# EAGLE board 20190801_MemEx_v1.1 (EAGLE 9.6.0)
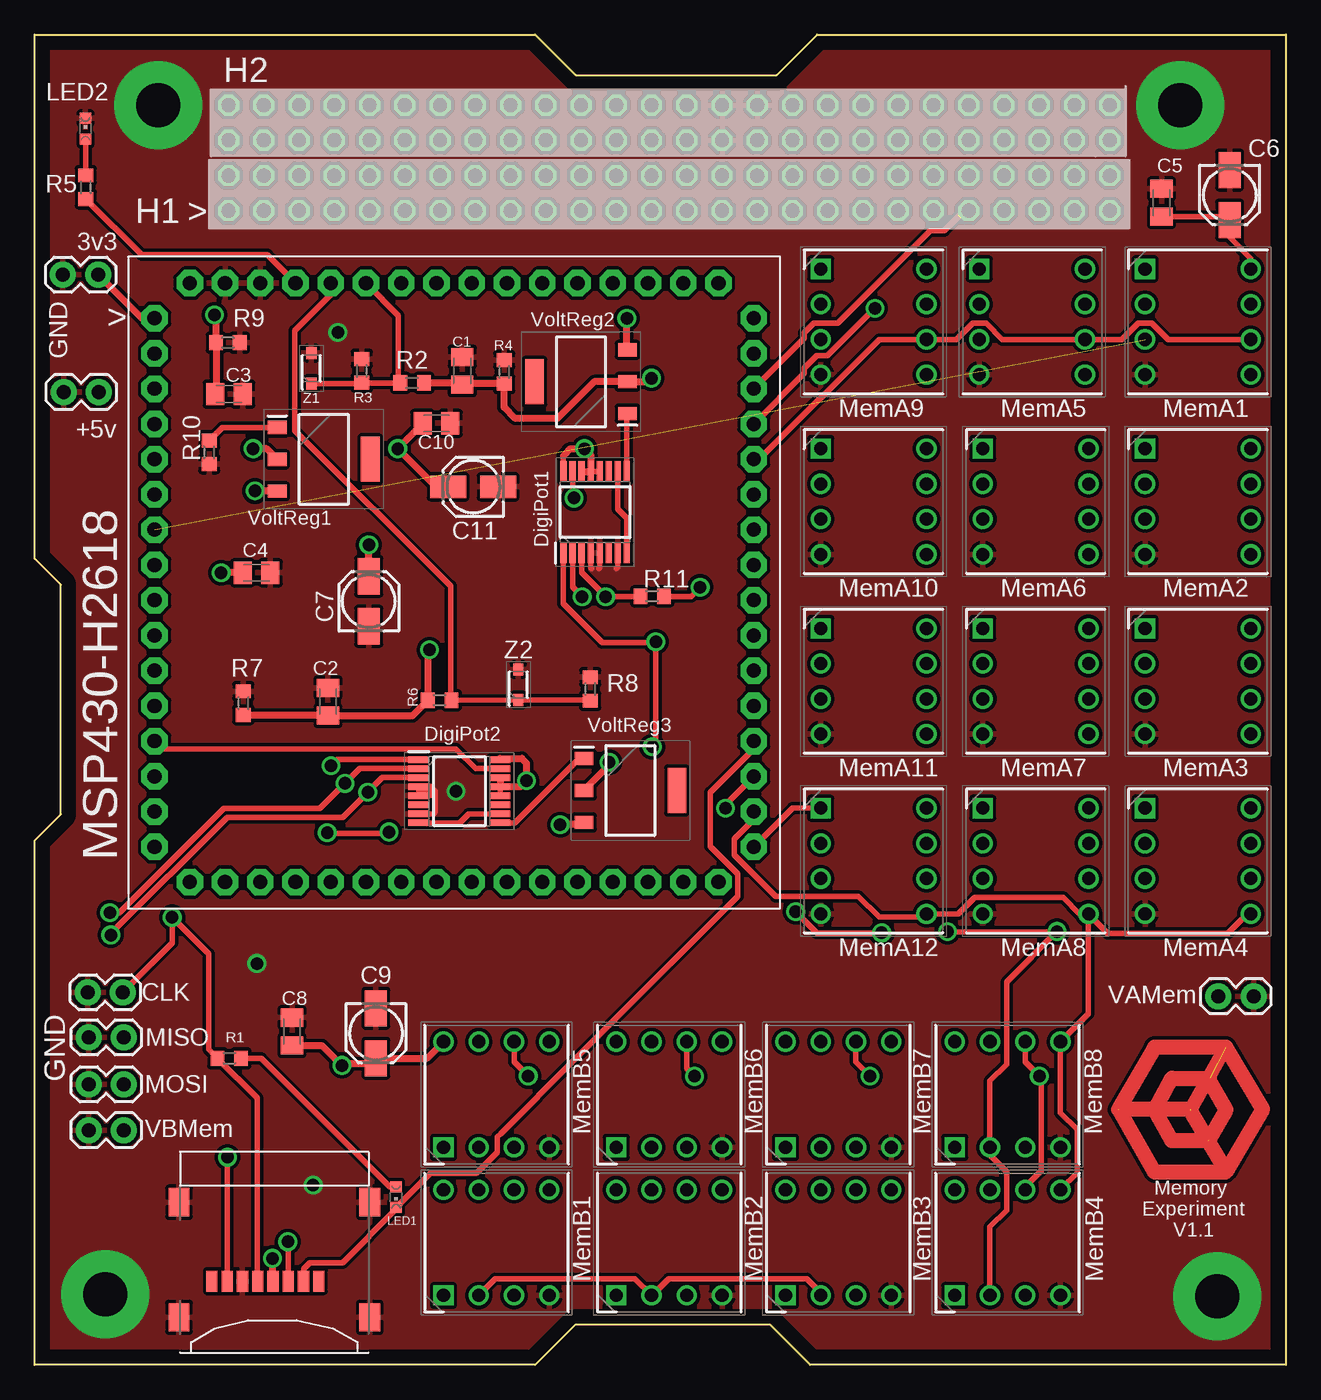
[diagram p0: board, top side]
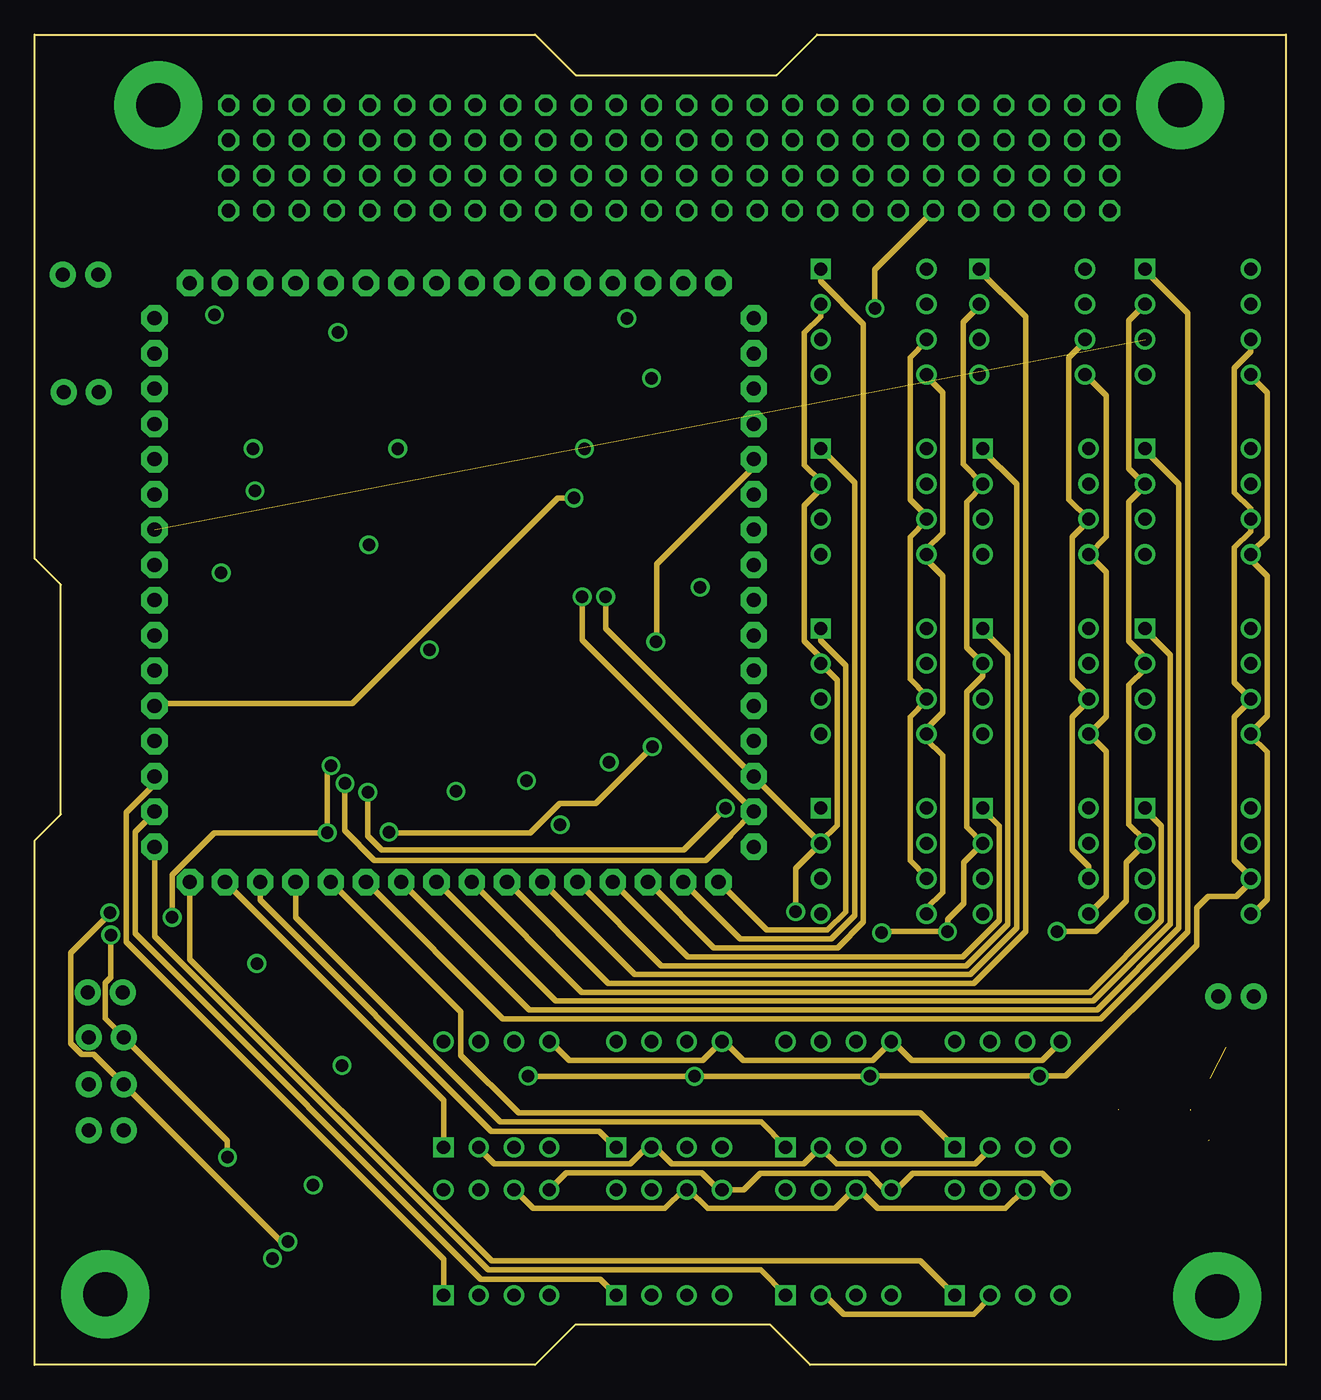
[diagram p1: board, inner layer Signal]
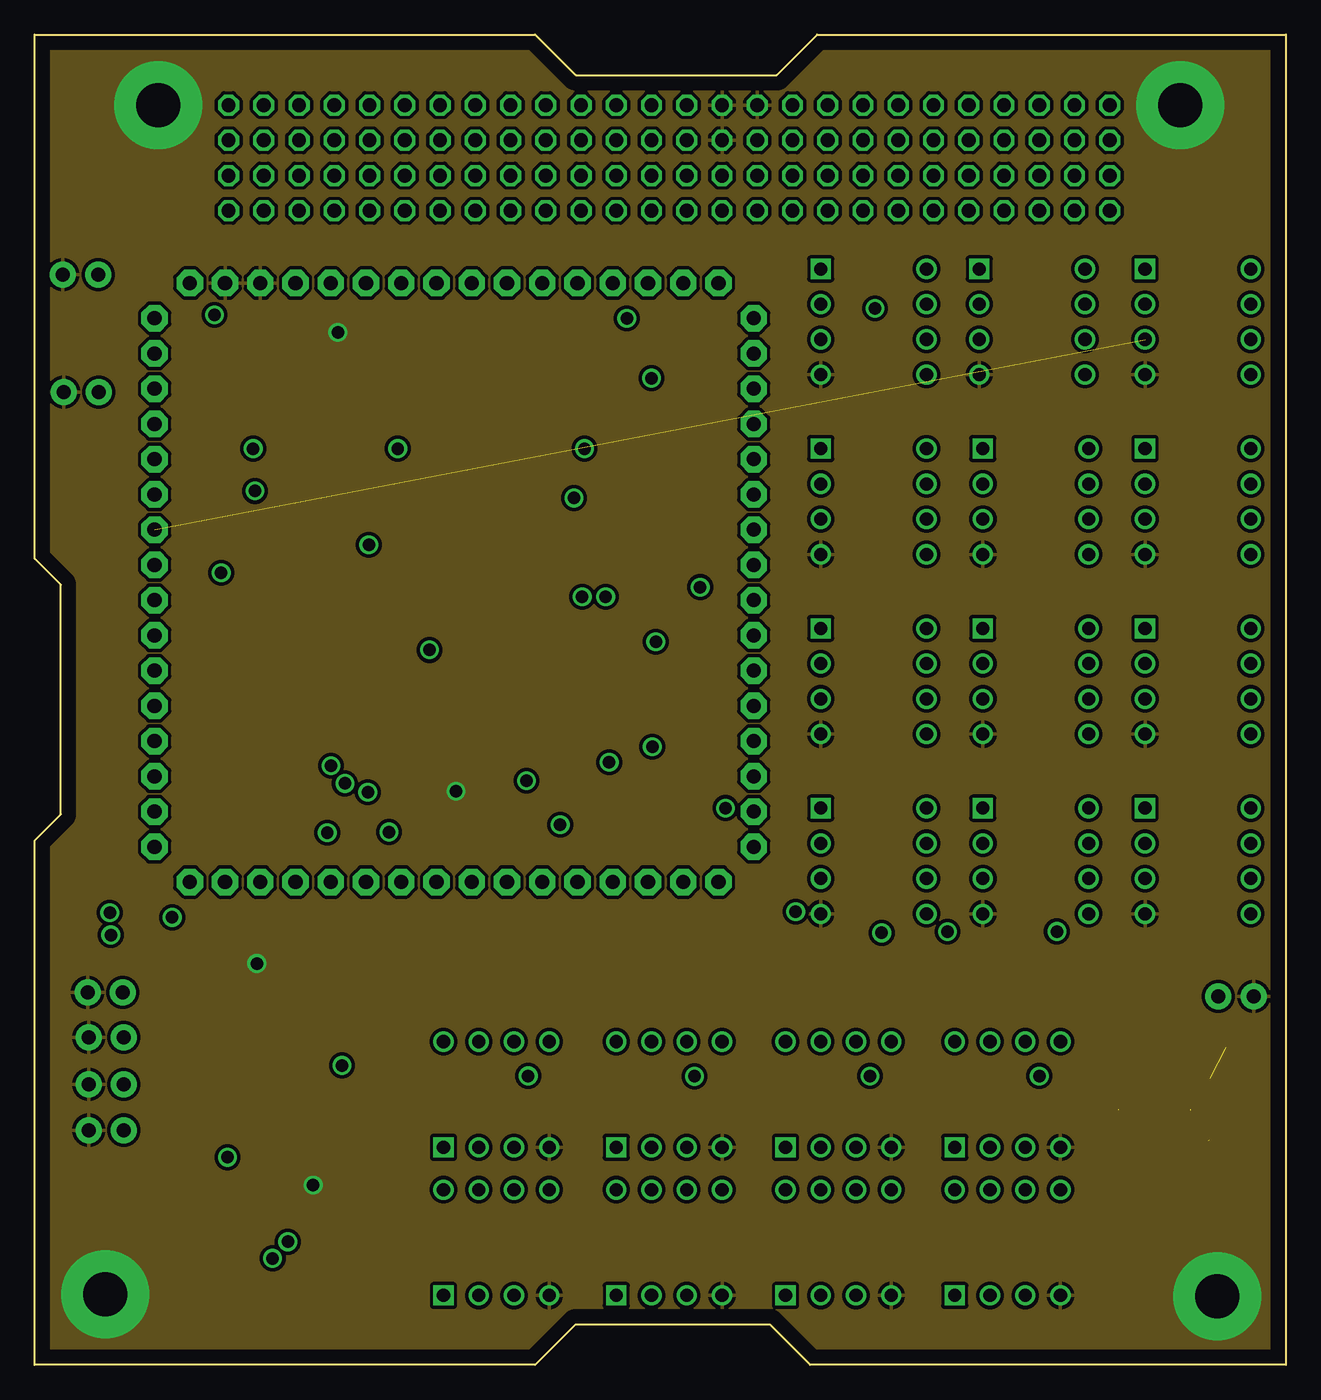
[diagram p2: board, inner layer GND2]
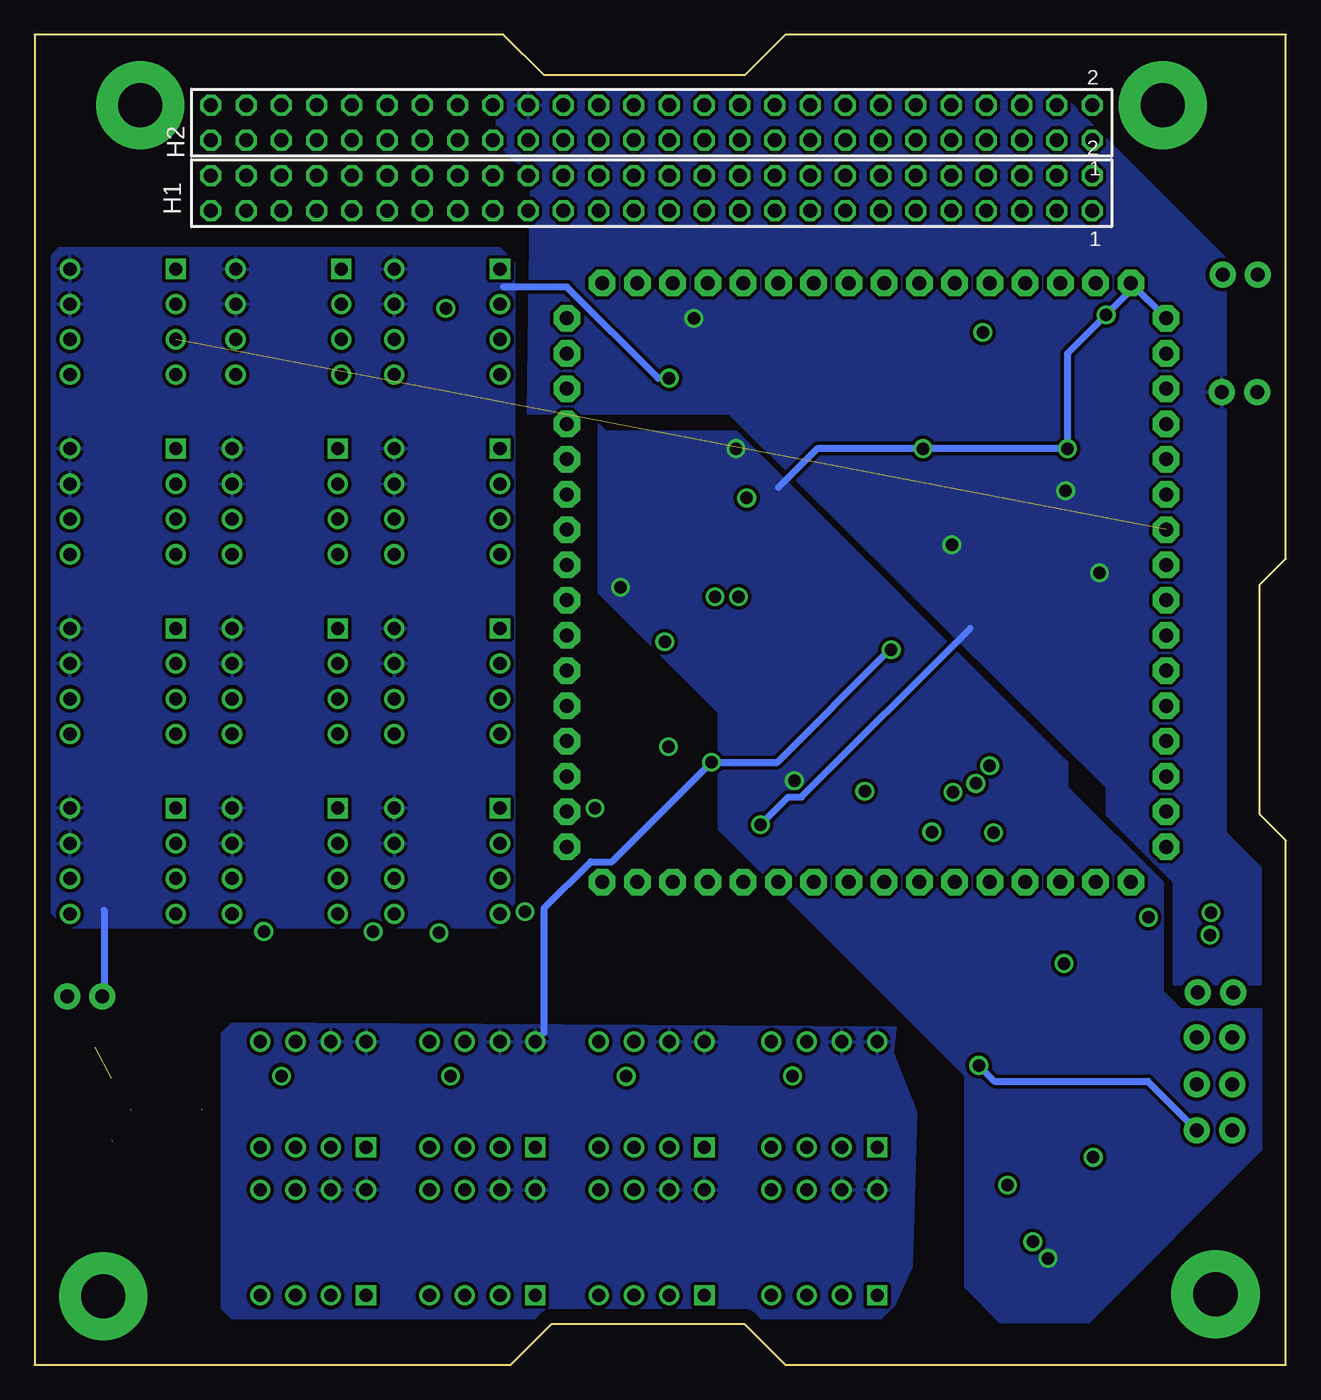
[diagram p3: board, bottom side, seen from below]

Size 90.17 x 95.89 mm. Coordinates in mm from the lower left corner, seen from the top.
Outline: 0,0 0,37.8 1.88,39.67 1.88,56.24 0,58.12 0,95.89 36.07,95.89 38.99,92.96 53.47,92.96 56.39,95.89 90.17,95.89 90.17,0 55.88,0 52.96,2.92 38.99,2.92 36.07,0 0,0
Copper layers (1+2*15+16): GND1 0.4mm / dielectric 3mm / Signal 0.035mm / dielectric 0.15mm / GND2 0.035mm / dielectric 0.2mm / Power 0.4mm
Design rules "Cadiz_2layer_etch *": minimum track width 15mil, minimum drill 0.3mm, track to track 6mil, track to pad 6mil, pad to pad 6mil, via to via 6mil, smd to smd 6mil, copper to edge 40mil, drill to drill 8mil, minimum pad ring 10mil, minimum via ring 8mil, stop-mask expansion 4mil, vias tented up to drill 0mil, thermal gap 10mil
Net classes: 0 default: width 0.254 mm, drill 0.9 mm, clearance 0.254 mm; 1 power: width 0.381 mm, drill 0.9 mm, clearance 0.254 mm; 2 gnd: width 0.254 mm, drill 0.9 mm, clearance 0.254 mm; 3 usbvcc: width 0.381 mm, drill 0.9 mm, clearance 0.254 mm; 4 aref: width 0.254 mm, drill 0.9 mm, clearance 0.254 mm

## Footprints (pad centres in the part's own frame; a part is rotated, then mirrored left to right if it is on the bottom)
C0805K = smd 1.3 x 1.6: 1 -1,0; 2 1,0
153CLV-0405 = smd 2.6 x 1.6: + 1.8,0; - -1.8,0
TSW-126-XX-G-D = drill 1 pad 1.5 octagon: 1 31.75,-1.27; 2 31.75,1.27; 3 29.21,-1.27; 4 29.21,1.27; 5 26.67,-1.27; 6 26.67,1.27; 7 24.13,-1.27; 8 24.13,1.27; 9 21.59,-1.27; 10 21.59,1.27; 11 19.05,-1.27; 12 19.05,1.27; 13 16.51,-1.27; 14 16.51,1.27; 15 13.97,-1.27; 16 13.97,1.27; 17 11.43,-1.27; 18 11.43,1.27; 19 8.89,-1.27; 20 8.89,1.27; 21 6.35,-1.27; 22 6.35,1.27; 23 3.81,-1.27; 24 3.81,1.27; 25 1.27,-1.27; 26 1.27,1.27; 27 -1.27,-1.27; 28 -1.27,1.27; 29 -3.81,-1.27; 30 -3.81,1.27; 31 -6.35,-1.27; 32 -6.35,1.27; 33 -8.89,-1.27; 34 -8.89,1.27; 35 -11.43,-1.27; 36 -11.43,1.27; 37 -13.97,-1.27; 38 -13.97,1.27; 39 -16.51,-1.27; 40 -16.51,1.27; 41 -19.05,-1.27; 42 -19.05,1.27; 43 -21.59,-1.27; 44 -21.59,1.27; 45 -24.13,-1.27; 46 -24.13,1.27; 47 -26.67,-1.27; 48 -26.67,1.27; 49 -29.21,-1.27; 50 -29.21,1.27; 51 -31.75,-1.27; 52 -31.75,1.27
SOP65P640X120-16N = smd 1.475 x 0.45: 1 -2.938,2.275; 2 -2.938,1.625; 3 -2.938,0.975; 4 -2.938,0.325; 5 -2.938,-0.325; 6 -2.938,-0.975; 7 -2.938,-1.625; 8 -2.938,-2.275; 9 2.938,-2.275; 10 2.938,-1.625; 11 2.938,-0.975; 12 2.938,-0.325; 13 2.938,0.325; 14 2.938,0.975; 15 2.938,1.625; 16 2.938,2.275
SOT230P700X180-4N = smd 1.35 x 0.95: 1 -3.35,2.3; 2 -3.35,0; 3 -3.35,-2.3 | smd 1.35 x 3.25: 4 3.35,0
DIPS762W70P254L1016H510Q8N = drill 0.95 pad 1.425 square: 1 0,0 | drill 0.95 pad 1.425: 2 0,-2.54; 3 0,-5.08; 4 0,-7.62; 5 7.62,-7.62; 6 7.62,-5.08; 7 7.62,-2.54; 8 7.62,0
MOLEX_47219-2001 = smd 0.8 x 1.5: 1 3.2,-2.1; 2 2.1,-2.1; 3 1,-2.1; 4 -0.1,-2.1; 5 -1.2,-2.1; 6 -2.3,-2.1; 7 -3.4,-2.1; 8 -4.5,-2.1 | smd 1.5 x 2.05: G1 6.875,-4.7; G2 6.875,3.6; G3 -6.875,3.6; G4 -6.875,-4.7
1X02 = drill 1.016 pad 1.88: 1 0,0; 2 2.54,0
CHIPLED_0603 = smd 0.8 x 0.8: A 0,-0.75; C 0,0.75
R0603 = smd 1 x 1.1: 1 -0.85,0; 2 0.85,0
MSP430-H2618 = drill 1.016 pad 1.905 octagon: P1 -21.59,19.05; P2 -21.59,16.51; P3 -21.59,13.97; P4 -21.59,11.43; P5 -21.59,8.89; P6 -21.59,6.35; P7 -21.59,3.81; P8 -21.59,1.27; P9 -21.59,-1.27; P10 -21.59,-3.81; P11 -21.59,-6.35; P12 -21.59,-8.89; P13 -21.59,-11.43; P14 -21.59,-13.97; P15 -21.59,-16.51; P16 -21.59,-19.05; P17 -19.05,-21.59; P18 -16.51,-21.59; P19 -13.97,-21.59; P20 -11.43,-21.59; P21 -8.89,-21.59; P22 -6.35,-21.59; P23 -3.81,-21.59; P24 -1.27,-21.59; P25 1.27,-21.59; P26 3.81,-21.59; P27 6.35,-21.59; P28 8.89,-21.59; P29 11.43,-21.59; P30 13.97,-21.59; P31 16.51,-21.59; P32 19.05,-21.59; P33 21.59,-19.05; P34 21.59,-16.51; P35 21.59,-13.97; P36 21.59,-11.43; P37 21.59,-8.89; P38 21.59,-6.35; P39 21.59,-3.81; P40 21.59,-1.27; P41 21.59,1.27; P42 21.59,3.81; P43 21.59,6.35; P44 21.59,8.89; P45 21.59,11.43; P46 21.59,13.97; P47 21.59,16.51; P48 21.59,19.05; P49 19.05,21.59; P50 16.51,21.59; P51 13.97,21.59; P52 11.43,21.59; P53 8.89,21.59; P54 6.35,21.59; P55 3.81,21.59; P56 1.27,21.59; P57 -1.27,21.59; P58 -3.81,21.59; P59 -6.35,21.59; P60 -8.89,21.59; P61 -11.43,21.59; P62 -13.97,21.59; P63 -16.51,21.59; P64 -19.05,21.59
SODFL2513X70N = smd 0.84 x 0.74: 1 -1.1,0; 2 1.1,0

## Placement (x,y rotation side)
C1  4.7u  [C0805K]  30.81,71.65 90 top
C2  4.7u  [C0805K]  21.13,47.8 90 top
C3  4.7u  [C0805K]  14,69.98 0 top
C4  1u  [C0805K]  15.98,57.1 0 top
C5  1u  [C0805K]  81.2,83.77 90 top
C6  0.1u  [153CLV-0405]  86.11,84.33 270 top
C7  0.1u  [153CLV-0405]  24.08,55.04 90 top
C8  1u  [C0805K]  18.54,24.03 90 top
C9  0.1u  [153CLV-0405]  24.59,23.9 270 top
C10  1u  [C0805K]  28.96,67.87 0 top
C11  0.1u  [153CLV-0405]  31.6,63.3 180 top
H1  H1  [TSW-126-XX-G-D]  45.72,84.45 0 bottom
H2  H2  [TSW-126-XX-G-D]  45.72,89.53 0 bottom
IC1  AD5235BRUZ250  [SOP65P640X120-16N]  40.39,61.47 90 top
IC2  LT3080EST#PBF  [SOT230P700X180-4N]  39.37,70.87 180 top
IC3  1-2199298-2  [DIPS762W70P254L1016H510Q8N]  56.64,40.13 0 top
IC4  1-2199298-2  [DIPS762W70P254L1016H510Q8N]  56.64,53.09 0 top
IC5  1-2199298-2  [DIPS762W70P254L1016H510Q8N]  56.64,66.04 0 top
IC6  1-2199298-2  [DIPS762W70P254L1016H510Q8N]  56.64,78.99 0 top
IC7  1-2199298-2  [DIPS762W70P254L1016H510Q8N]  68.33,40.13 0 top
IC8  1-2199298-2  [DIPS762W70P254L1016H510Q8N]  68.33,53.09 0 top
IC9  1-2199298-2  [DIPS762W70P254L1016H510Q8N]  68.33,66.04 0 top
IC10  1-2199298-2  [DIPS762W70P254L1016H510Q8N]  68.07,78.99 0 top
IC11  1-2199298-2  [DIPS762W70P254L1016H510Q8N]  80.01,40.13 0 top
IC12  1-2199298-2  [DIPS762W70P254L1016H510Q8N]  80.01,53.09 0 top
IC13  1-2199298-2  [DIPS762W70P254L1016H510Q8N]  80.01,66.04 0 top
IC14  1-2199298-2  [DIPS762W70P254L1016H510Q8N]  80.01,78.99 0 top
IC15  LT3080EST#PBF  [SOT230P700X180-4N]  42.93,41.4 0 top
IC16  AD5235BRUZ250  [SOP65P640X120-16N]  30.61,41.35 0 top
IC17  1-2199298-2  [DIPS762W70P254L1016H510Q8N]  29.46,15.67 90 top
IC18  1-2199298-2  [DIPS762W70P254L1016H510Q8N]  41.91,15.67 90 top
IC19  1-2199298-2  [DIPS762W70P254L1016H510Q8N]  54.1,15.67 90 top
IC20  1-2199298-2  [DIPS762W70P254L1016H510Q8N]  66.29,15.67 90 top
IC21  1-2199298-2  [DIPS762W70P254L1016H510Q8N]  29.46,5 90 top
IC22  1-2199298-2  [DIPS762W70P254L1016H510Q8N]  41.91,5 90 top
IC23  1-2199298-2  [DIPS762W70P254L1016H510Q8N]  54.1,5 90 top
IC24  1-2199298-2  [DIPS762W70P254L1016H510Q8N]  66.29,5 90 top
IC25  LT3080EST#PBF  [SOT230P700X180-4N]  20.83,65.28 0 top
J1  47219-2001  [MOLEX_47219-2001]  17.27,8.13 0 top
J2  [1X02]  3.89,23.6 0 top
J3  [1X02]  2.08,70.13 0 top
J4  [1X02]  2.03,78.59 0 top
J5  [1X02]  87.83,26.57 180 top
J6  [1X02]  3.89,16.92 0 top
J7  [1X02]  3.89,20.22 0 top
J8  [1X02]  3.81,26.85 0 top
LED1  RED 0603  [CHIPLED_0603]  26.04,12.09 180 top
LED2  GREEN 0603  [CHIPLED_0603]  3.66,89.1 0 top
R1  470  [R0603]  14.02,22.1 0 top
R2  3.4k  [R0603]  27.2,70.79 0 top
R3  6.65k  [R0603]  23.57,71.65 270 top
R4  470  [R0603]  33.83,71.58 270 top
R5  470  [R0603]  3.68,84.89 270 top
R6  3.4k  [R0603]  29.18,47.9 180 top
R7  470  [R0603]  15.04,47.7 270 top
R8  6.65k  [R0603]  40.03,48.72 270 top
R9  470  [R0603]  13.92,73.69 180 top
R10  330k  [R0603]  12.57,65.79 90 top
R11  2.2k  [R0603]  44.5,55.4 0 top
U$1  MSP430-H2618  [MSP430-H2618]  30.23,56.39 0 top
Z1  3.43V  [SODFL2513X70N]  19.94,71.83 90 top
Z2  3.43V  [SODFL2513X70N]  34.85,49.02 90 top

## Library data of the parts
C1-C11 = rcl; SPICEPREFIX: C
H1 H2 = con-samtec; MF: Samtec Inc.; MPN: TSW-126-07-G-D
IC1 IC16 = AD5235BRUZ250; DESCRIPTION: AD5235BRUZ250 256-step dual pot, 250K AD5235BRUZ250, Digital Potentiometer 250k 1024-Position Linear, Log 2-channel Serial-4 Wire, Serial-SPI 16-Pin TSSOP; HEIGHT: 1.2mm; MANUFACTURER_NAME: Analog Devices; MANUFACTURER_PART_NUMBER: AD5235BRUZ250; MOUSER_PART_NUMBER: 584-AD5235BRUZ250; MOUSER_PRICE-STOCK: https://www.mouser.com/Search/Refine.aspx?Keyword=584-AD5235BRUZ250; RS_PART_NUMBER: 0228536; RS_PRICE-STOCK: http://uk.rs-online.com/web/p/products/0228536
IC2 IC15 IC25 = LT3080EST#PBF; DESCRIPTION: Adjust single Resistor 1.1A LDO LT3080 LT3080EST#PBF, Low Dropout Voltage Regulator, Adjustable 1.1A, 0 30 V, 4-Pin SOT-223; HEIGHT: 1.8mm; MANUFACTURER_NAME: Linear Technology; MANUFACTURER_PART_NUMBER: LT3080EST#PBF; MOUSER_PART_NUMBER: 584-LT3080EST#PBF; MOUSER_PRICE-STOCK: https://www.mouser.com/Search/Refine.aspx?Keyword=584-LT3080EST%23PBF; RS_PART_NUMBER: 9173453; RS_PRICE-STOCK: https://uk.rs-online.com/web/p/products/9173453
IC3-IC14 IC17-IC24 = 1-2199298-2; ALLIED_NUMBER: 71373899; ALLIED_PRICE-STOCK: https://www.alliedelec.com/teconnectivity-1-2199298-2/71373899/; DESCRIPTION: TE CONNECTIVITY - 1-2199298-2 - IC SOCKET, DIP, 8POS, TH; HEIGHT: 5.1mm; MANUFACTURER_NAME: TE Connectivity; MANUFACTURER_PART_NUMBER: 1-2199298-2; MOUSER_PART_NUMBER: 571-1-2199298-2; MOUSER_PRICE-STOCK: https://www.mouser.com/Search/Refine.aspx?Keyword=571-1-2199298-2; RS_PART_NUMBER: 1859254; RS_PRICE-STOCK: http://uk.rs-online.com/web/p/products/1859254
J1 = molex_sd_47219-2001; AVAILABILITY: Good; DESCRIPTION: Conn Micro SD Card SKT 8 POS 1.1mm Solder RA SMD 0.5A/Contact Embossed T/R; MF: Molex; MP: 47219-2001; PACKAGE: None; PRICE: 0.62 USD
J2-J8 = SparkFun-Connectors
LED1 LED2 = adafruit
R1-R11 = rcl; SPICEPREFIX: R
U$1 = MSP430-H2618
Z1 Z2 = PLZ3V3B-G3_H; DESCRIPTION: Zener Diodes 500mW PLZ Zener MicroSMF (DO-219AC); HEIGHT: 0.7mm; MANUFACTURER_NAME: Vishay; MANUFACTURER_PART_NUMBER: PLZ3V3B-G3/H; MOUSER_PART_NUMBER: 78-PLZ3V3B-G3/H; MOUSER_PRICE-STOCK: https://www.mouser.com/Search/Refine.aspx?Keyword=78-PLZ3V3B-G3%2FH

## Nets
1/D7: H1.31
2/+5V: H1.32
3V3: C3.1 C10.1 C11.+ IC1.12 IC1.13 IC1.14 IC1.16 IC16.12 IC16.13 IC16.14 IC16.16 IC25.2 J1.4 J4.2 R9.2 R11.2 U$1.P1 U$1.P64
3V3SET: IC25.1 R10.2
9/SCK: H1.21
10/MOSI: H1.23
11/MISO: H1.22
12/IO11*: H1.36
13/RESET: H1.29
18/D3/SCL: H1.43 U$1.P46
19/D2/SDA: H1.41 U$1.P45
20/D0/RX: H1.19
21/D1/TX: H1.20
25/D4: H1.24
26/IO12: H1.35
28/IO8: H1.25
+5V [usbvcc]: C4.1 C7.+ H2.34 IC2.3 IC15.3 IC25.3 J3.2
CLK: IC1.1 IC3.6 IC4.6 IC5.6 IC6.6 IC7.6 IC8.6 IC9.6 IC10.6 IC11.6 IC12.6 IC13.6 IC14.6 IC16.1 IC17.6 IC18.6 IC19.6 IC20.6 IC21.6 IC22.6 IC23.6 IC24.6 J1.5 J8.2 R1.1 U$1.P44
CS1_1: IC14.1 U$1.P22
CS1_2: IC13.1 U$1.P23
CS1_3: IC12.1 U$1.P24
CS1_4: IC11.1 U$1.P25
CS1_5: IC10.1 U$1.P26
CS1_6: IC9.1 U$1.P27
CS1_7: IC8.1 U$1.P28
CS1_8: IC7.1 U$1.P29
CS1_9: IC6.1 U$1.P30
CS1_10: IC5.1 U$1.P31
CS1_11: IC4.1 U$1.P32
CS1_12: IC3.1 U$1.P33
CS2_1: IC21.1 U$1.P14
CS2_2: IC22.1 U$1.P15
CS2_3: IC23.1 U$1.P16
CS2_4: IC24.1 U$1.P17
CS2_5: IC17.1 U$1.P18
CS2_6: IC18.1 U$1.P19
CS2_7: IC19.1 U$1.P20
CS2_8: IC20.1 U$1.P21
CS_POT1: IC1.15 U$1.P12
CS_POT2: IC16.15 U$1.P13
CS_SD: J1.2 LED1.C U$1.P36
GND [power]: C1.2 C2.2 C3.2 C4.2 C5.2 C6.- C7.- C8.2 C9.- C10.2 C11.- H2.29 H2.30 H2.32 IC1.4 IC1.5 IC1.7 IC3.4 IC4.4 IC5.4 IC6.4 IC7.4 IC8.4 IC9.4 IC10.4 IC11.4 IC12.4 IC13.4 IC14.4 IC16.4 IC16.5 IC16.7 IC17.4 IC18.4 IC19.4 IC20.4 IC21.4 IC22.4 IC23.4 IC24.4 J1.6 J1.G1 J1.G2 J1.G3 J1.G4 J2.1 J3.1 J4.1 J5.1 J6.1 J7.1 J8.1 LED2.C R3.1 R4.1 R7.1 R8.1 R9.1 R10.1 U$1.P62 U$1.P63 Z1.2 Z2.2
MEMVOLT1: C1.1 C5.1 C6.+ IC2.2 IC3.7 IC3.8 IC4.7 IC4.8 IC5.7 IC5.8 IC6.7 IC6.8 IC7.7 IC7.8 IC8.7 IC8.8 IC9.7 IC9.8 IC10.7 IC10.8 IC11.7 IC11.8 IC12.7 IC12.8 IC13.7 IC13.8 IC14.7 IC14.8 J5.2 R2.2 R4.2
MEMVOLT2: C2.1 C8.1 C9.+ IC15.2 IC17.7 IC17.8 IC18.7 IC18.8 IC19.7 IC19.8 IC20.7 IC20.8 IC21.7 IC21.8 IC22.7 IC22.8 IC23.7 IC23.8 IC24.7 IC24.8 J6.2 R6.2 R7.2
MISO: IC1.3 IC3.2 IC4.2 IC5.2 IC6.2 IC7.2 IC8.2 IC9.2 IC10.2 IC11.2 IC12.2 IC13.2 IC14.2 IC16.3 IC17.2 IC18.2 IC19.2 IC20.2 IC21.2 IC22.2 IC23.2 IC24.2 J1.7 J2.2 R11.1 U$1.P35
MOSI: IC1.2 IC3.5 IC4.5 IC5.5 IC6.5 IC7.5 IC8.5 IC9.5 IC10.5 IC11.5 IC12.5 IC13.5 IC14.5 IC16.2 IC17.5 IC18.5 IC19.5 IC20.5 IC21.5 IC22.5 IC23.5 IC24.5 J1.3 J7.2 U$1.P34
N$1: R5.2 U$1.P61
N$2: H1.1
N$3: LED2.A R5.1
N$4: LED1.A R1.2
N$5: R6.1 R8.2 U$1.P60 Z2.1
N$6: IC14.3 U$1.P7
N$11: H1.18
N$12: H1.17
N$19: R2.1 R3.2 U$1.P59 Z1.1
POTVOLT1: IC1.9 IC2.1
POTVOLT2: IC15.1 IC16.9
TESTVOLT1: IC1.8 IC1.10
TESTVOLT2: IC16.8 IC16.10

## Tracks (layer width: path | path; a pad name or v marks a point on that pad's centre or on a via)
3V3  (via drill 0.9)
  GND1 0.381: R11.2 47.3,55.4 v47.95,56.06
  GND1 0.406: IC1.12 IC1.13 | IC1.14 39.49,64.41 | IC16.16 33.55,43.71 | IC16.14 33.55,42.24 | IC16.12 IC16.13 | 38.11,65.54 38.08,65.51 38.08,64.41 IC1.16
  GND1 0.508: 33.55,42.24 IC16.13 35,41.68 v35.43,42.11 35.43,43.38 35.11,43.71 33.55,43.71 | C3.1 13.07,70.05 R9.2 13.07,75.58 v12.95,75.69 | IC25.2 16.72,66.04 v15.75,66.04 | C10.1 27.96,67.83 v26.16,66.04 28.91,63.3 C11.+ | 38.11,65.54 38.61,66.04 v39.62,66.04 40.06,65.6 IC1.13 39.49,64.41 | J1.4 17.17,7.64 v17.14,7.67 | U$1.P1 7.72,75.44 J4.2
  Power 0.508: U$1.P1 U$1.P64 11.18,77.47 v12.95,75.69 15.75,72.9 v15.75,66.04 v26.16,66.04 33.78,66.04 36.58,63.25
  pour Power: 39.62,67.31 15.75,43.43 15.75,41.66 8.89,34.8 8.89,26.92 7.62,25.65 1.78,25.65 1.78,15.49 14.22,3.05 20.57,3.05 23.11,5.59 23.11,20.83 40.89,38.61 40.89,46.99 49.53,55.63 49.53,67.82 49.02,67.31
3V3SET
  GND1 0.381: R10.2 13.52,67.58 IC25.1
18/D3/SCL
  GND1 0.381: U$1.P46 55.47,74.01 55.47,74.4 56.16,75.09 57.88,75.09 64.54,81.75 65.53,81.75 66.97,83.19 H1.43
19/D2/SDA  (via drill 0.9)
  GND1 0.381: U$1.P45 55.47,71.47 55.47,71.86 56.35,72.74 57.13,72.74 v60.55,76.16
  Signal 0.381: H1.41 60.55,78.96 v60.55,76.16
+5V  (via drill 0.9)
  GND1 0.508: IC25.3 15.89,62.98 v15.88,62.99 | IC2.3 42.67,73.21 v42.67,75.44 | C7.+ v24.08,59.11 | C4.1 v13.44,57.1 | IC15.3 39.42,38.94 v37.87,38.94
  Power 0.508: v37.87,38.94 35.88,40.93 34.92,40.93 22.76,53.09
  pour Power: 56.9,91.95 56.9,88.14 54.41,85.65 54.66,68.58 40.13,68.58 39.12,67.56 12.95,41.66 12.95,39.62 8.13,34.8 8.13,27.43 1.78,27.43 1.78,35.81 4.32,38.35 4.32,79.76 16.51,91.95
CLK  (via drill 0.9)
  GND1 0.381: U$1.P44 52.21,65.28 60.84,73.91 IC6.6 66.41,73.91 67.59,75.09 68.56,75.09 69.73,73.91 IC10.6 78.35,73.91 79.52,75.09 80.5,75.09 81.67,73.91 IC14.6 | IC16.1 21.8,43.63 v21.35,43.18 | IC20.6 71.37,21.84 v72.39,20.82 72.54,20.67 72.54,16.8 72.55,16.79 72.55,13.99 71.37,12.82 IC24.6 | IC19.6 59.18,21.84 v60.2,20.82 | IC18.6 46.99,21.35 v47.55,20.8 | v35.56,20.83 34.54,21.84 IC17.6 | 38.09,58.53 38.09,54.87 40.89,52.07 44.7,52.07 v44.76,52.13 44.76,44.81 v44.51,44.55 | J1.5 16.02,6.08 16.02,19.25 R1.1 12.54,22.73 12.54,29.63 v9.91,32.26 9.91,30.4 J8.2 | v25.53,38.41 25.42,38.3 21.13,38.3 v21.08,38.35
  GND1 0.406: IC1.1 38.09,58.53
  Signal 0.381: IC6.6 64.26,73.8 63.09,72.62 63.09,62.39 64.26,61.21 IC5.6 64.26,60.84 63.09,59.67 63.09,49.43 64.26,48.26 IC4.6 64.26,47.89 63.09,46.71 63.09,36.34 64.26,35.17 IC3.6 | IC10.6 75.69,73.8 74.52,72.62 74.52,62.39 IC9.6 75.95,60.84 74.77,59.67 74.77,49.43 75.95,48.26 IC8.6 75.95,47.89 74.77,46.71 74.77,37.11 75.95,35.93 IC7.6 | IC12.6 87.63,47.89 86.46,46.71 86.46,36.34 87.63,35.17 IC11.6 87.63,34.8 86.59,33.76 84.56,33.76 83.72,32.92 83.72,30.25 74.3,20.82 v72.39,20.82 v60.2,20.82 60.17,20.8 v47.55,20.8 35.59,20.8 v35.56,20.83 | IC12.6 | IC12.6 86.46,49.18 86.46,58.91 87.63,60.08 IC13.6 87.63,61.72 86.46,62.9 86.46,71.86 87.63,73.03 IC14.6 | v9.91,32.26 9.91,35.31 12.95,38.35 v21.08,38.35 21.08,42.91 v21.35,43.18 | IC21.6 34.59,12.62 35.94,11.27 45.42,11.27 46.77,12.62 IC22.6 47.14,12.62 48.49,11.27 57.69,11.27 59.04,12.62 IC23.6 59.41,12.62 60.76,11.27 69.95,11.27 71.31,12.62 IC24.6 | U$1.P44 51.82,64.71 44.83,57.73 44.83,52.2 v44.76,52.13 | v44.51,44.55 40.44,40.48 37.83,40.48 35.7,38.35 25.58,38.35 v25.53,38.41
CS1_1
  Signal 0.381: IC14.1 80.01,78.88 83.09,75.8 83.09,31.22 76.82,24.95 33.72,24.95 U$1.P22
CS1_2
  Signal 0.381: IC13.1 80.01,65.92 82.45,63.48 82.45,31.49 76.56,25.59 35.62,25.59 U$1.P23
CS1_3
  Signal 0.381: IC12.1 80.01,52.97 81.82,51.16 81.82,31.75 81.81,31.75 76.28,26.22 37.53,26.22 U$1.P24
CS1_4
  Signal 0.381: IC11.1 80.01,40.01 81.18,38.84 81.18,32.03 76.02,26.86 39.43,26.86 U$1.P25
CS1_5
  Signal 0.381: IC10.1 68.07,78.88 71.4,75.54 71.4,31.24 67.67,27.5 41.34,27.5 U$1.P26
CS1_6
  Signal 0.381: IC9.1 68.33,65.92 70.77,63.48 70.77,31.5 67.41,28.14 43.24,28.14 U$1.P27
CS1_7
  Signal 0.381: IC8.1 68.33,52.97 70.14,51.16 70.14,31.76 67.15,28.77 45.14,28.77 U$1.P28
CS1_8
  Signal 0.381: IC7.1 68.33,40.01 69.5,38.84 69.5,32.03 66.88,29.41 47.04,29.41 U$1.P29
CS1_9
  Signal 0.381: IC6.1 56.64,78.11 59.72,75.03 59.72,31.91 57.86,30.06 48.94,30.06 U$1.P30
CS1_10
  Signal 0.381: IC5.1 59.09,63.6 59.09,32.4 57.39,30.7 50.84,30.7 U$1.P31
CS1_11
  Signal 0.381: IC4.1 56.64,52.21 58.45,50.4 58.45,32.66 57.13,31.34 52.74,31.34 U$1.P32
CS1_12
  GND1 0.381: U$1.P33 54.61,40.13 IC3.1
CS2_1
  Signal 0.381: IC21.1 29.46,7.62 6.6,30.48 6.6,39.82 8.64,41.85 U$1.P14
CS2_2
  Signal 0.381: U$1.P15 8.64,39.82 7.24,38.42 7.24,31.1 32.16,6.18 40.74,6.18 IC22.1
CS2_3
  Signal 0.381: IC23.1 54.1,5.06 52.33,6.84 32.68,6.84 8.64,30.88 U$1.P16
CS2_4
  Signal 0.381: IC24.1 63.8,7.49 32.92,7.49 11.18,29.24 U$1.P17
CS2_5
  Signal 0.381: IC17.1 29.46,19.05 U$1.P18
CS2_6
  Signal 0.381: U$1.P19 16.26,33.5 32.91,16.84 40.67,16.84 41.84,15.67 IC18.1
CS2_7
  Signal 0.381: U$1.P20 18.8,32.25 33.53,17.51 52.35,17.51 54.1,15.76 IC19.1
CS2_8
  Signal 0.381: U$1.P21 30.71,25.43 30.71,22.32 34.87,18.16 63.8,18.16 IC20.1
CS_POT1  (via drill 0.9)
  GND1 0.381: v38.86,62.48 38.76,62.59 IC1.15
  Signal 0.381: v38.86,62.48 37.68,62.48 22.89,47.69 8.83,47.69 U$1.P12
CS_POT2
  GND1 0.381: IC16.15 31.78,42.98 30.35,44.4 9.2,44.4 U$1.P13
CS_SD
  GND1 0.381: LED1.C 26.04,11.21 22.19,7.37 19.81,7.37 19.37,6.93 J1.2 | U$1.P36 51.82,44.39 48.67,41.24 48.67,37.38 50.67,35.38 50.67,33.77 38.96,22.06 | 38.96,22.06 | 38.96,22.06 33.57,16.67
  GND1 0.406: LED1.C 28.52,13.81 31.82,13.81 33.32,15.31 33.32,16.42 33.57,16.67
GND  (via drill 0.9, 3.17 pad 6.35)
  GND1 0.381: IC1.4 40.06,57.48 40.13,57.4 | IC1.5 40.71,57.48 40.64,57.4 | IC1.7 42.01,57.51 41.91,57.4 | IC16.5 27.67,41.35 | 27.67,41.35 IC16.4 | IC16.7 28.73,39.73 28.83,39.83 | 27.67,41.35 28.83,41.35 28.86,41.35
  GND1 0.406: IC16.4 28.5,41.68 28.83,41.35 28.5,41.03 IC16.5 | 28.86,41.35 28.86,39.86 28.83,39.83
  other vias: 5.08,5.08 8.89,90.81 82.55,90.81 85.22,4.95 21.84,74.42 30.35,41.35 20.07,12.95 16,28.93
  pour GND1 (isolate 0.254): 0,0 0,37.8 1.88,39.67 1.88,56.24 0,58.12 0,95.89 36.07,95.89 38.99,92.96 53.47,92.96 56.39,95.89 90.17,95.89 90.17,0 55.88,0 52.96,2.92 38.99,2.92 36.07,0
  pour GND2: 0,96.01 0,58.17 2.03,56.13 2.03,39.88 0,37.85 0,0 36.07,0 38.86,2.79 53.09,2.79 55.88,0 56.13,0 90.17,0 90.17,95.76 56.13,95.76 53.34,92.96 38.86,92.96 36.07,95.76 1.52,95.76
LOGO  (5 unrouted)
  GND1 1.016: 83.28,18.36 85.83,22.9
  GND1 1.067: 78.13,18.47 80.71,22.89 85.83,22.89 88.48,18.42 85.83,13.89 80.72,13.89 | 84.66,20.65 81.94,20.65 80.72,18.39 81.93,16.18 84.63,16.18 | 84.56,16.13 85.85,18.39 84.53,20.7 | 85.85,13.95 83.28,18.36 | 83.25,18.4 78.12,18.4 | 78.11,18.39 80.64,13.95
MEMVOLT1  (via drill 0.9)
  GND1 0.381: C5.1 85.86,82.77 C6.+ 86.11,81.28 87.63,79.76 IC14.8 | R2.2 31.38,70.79 31.39,70.78
  GND1 0.508: 31.34,70.73 R4.2 33.83,69.04 34.65,68.22 37.67,68.22 40.31,70.87 IC2.2 44.2,70.87 v44.45,71.12 | 31.34,70.73 30.88,70.73 C1.1 30.67,70.79 R2.2 | 31.39,70.78 31.34,70.73
  Power 0.508: v44.45,71.12 45.24,71.12 51.82,77.69 56.39,77.69 | 85.17,32.79 85.17,26.69 J5.2
  pour Power: 88.39,80.52 56.64,80.52 55.63,79.5 55.63,32.26 56.39,31.5 87.88,31.5 88.65,32.26 89.15,32.77 89.15,79.25 89.15,79.76
MEMVOLT2  (via drill 0.9)
  GND1 0.508: C8.1 18.57,23 20.71,23 v22.14,21.58 22.24,21.68 24.17,21.68 C9.+ 28.27,22.1 IC17.8 | v41.4,43.43 41.4,43.23 IC15.2 | R7.2 15.09,46.8 C2.1 27.23,46.8 R6.2 28.34,51.42 v28.45,51.54
  Power 0.508: IC19.8 53.48,23.91 53.48,32.89 50.12,36.26 48.58,36.26 v41.4,43.43 36.68,43.43 28.57,51.54 v28.45,51.54 | J6.2 9.96,20.45 21.01,20.45 v22.14,21.58
  pour Power: 28.13,24.36 28.32,22.53 26.64,18.19 26.97,7.06 28.22,4.29 29.21,3.3 75.95,3.3 76.71,4.06 76.71,23.88 75.95,24.64
MISO  (via drill 0.9)
  GND1 0.381: v65.78,31.22 73.64,31.22 v73.66,31.24 70.03,27.61 70.03,21.66 68.83,20.46 IC20.2 68.83,15.12 70.03,13.92 70.03,11.15 68.83,9.95 IC24.2 | v49.78,40.13 49.78,40.39 U$1.P35 | v61.04,31.14 v61.03,31.13 56.36,31.13 v54.84,32.66 | IC23.2 56.64,5.18 55.62,6.2 45.69,6.2 44.49,5 IC22.2 43.26,6.2 33.2,6.2 IC21.2 | IC16.3 25.03,42.33 24,41.3 v24,41.27 22.2,39.47 13.88,39.47 5.48,31.08 v5.48,30.99 | J1.7 13.87,14.94 v13.89,14.96 | IC1.3 39.41,57.11 v41.15,55.37 43.62,55.37 R11.1
  Signal 0.381: v73.66,31.24 76.45,31.24 78.64,33.43 78.64,36.23 IC11.2 80.01,37.79 78.84,38.97 78.84,49 80.01,50.17 IC12.2 80.01,51 78.84,52.17 78.84,62.21 80.01,63.38 IC13.2 79.95,63.5 78.84,64.62 78.84,75.28 IC14.2 | IC6.2 56.64,75.57 55.47,74.4 55.47,64.87 56.64,63.7 IC5.2 56.64,63.13 55.47,61.95 55.47,52.17 56.64,51 IC4.2 57.82,49.37 57.82,38.88 56.64,37.71 IC3.2 | IC10.2 67.82,76.2 67.82,76.08 66.9,75.16 66.9,64.93 IC9.2 68.33,63.38 67.15,62.21 67.15,51.72 IC8.2 68.33,49.67 67.15,48.49 67.15,38.77 IC7.2 66.96,36.23 66.96,33.27 65.78,32.09 v65.78,31.23 v65.78,31.22 65.75,31.24 61.14,31.24 v61.04,31.14 | IC3.2 54.84,35.79 v54.84,32.66 | v49.78,40.13 46.76,37.11 25.02,37.11 24,38.12 v24,41.27 | IC24.2 68.83,4.82 67.66,3.65 58.29,3.65 56.94,5 IC23.2 | IC20.2 68.83,15.54 67.77,14.47 57.78,14.47 56.64,15.61 IC19.2 56.59,15.67 55.42,14.5 45.89,14.5 44.72,15.67 IC18.2 44.1,15.67 42.92,14.5 33.12,14.5 32,15.62 IC17.2 | v13.89,14.96 13.87,14.96 13.87,16.15 J2.2 5.07,24.96 5.07,27.52 5.48,27.94 v5.48,30.99 | IC3.2 U$1.P35 41.15,53.09 v41.15,55.37
MOSI  (via drill 0.9)
  GND1 0.381: U$1.P34 51.82,39.31 50.42,37.92 50.42,36.76 53.4,33.78 59.36,33.78 60.87,32.28 64.03,32.28 IC3.5 66.55,32.51 67.73,33.69 74.11,33.69 75.29,32.51 IC7.5 75.92,32.51 | IC11.5 87.38,32.51 85.97,31.1 77.33,31.1 75.92,32.51 | IC16.2 23.42,42.98 v22.35,41.91 20.55,40.11 13.61,40.11 6.1,32.59 v5.41,32.59 | 75.92,32.51 75.92,25.3 IC20.5 73.91,18.17 75.11,16.97 75.11,13.84 73.91,12.64 IC24.5 | IC1.2 38.76,56.07 v39.46,55.37 | v18.24,8.87 18.27,8.85 J1.3
  Signal 0.381: IC6.5 64.26,71.26 65.44,70.08 65.44,59.97 64.26,58.79 IC5.5 64.26,58.05 65.44,56.87 65.44,47.01 64.26,45.84 IC4.5 64.26,45.09 65.44,43.92 65.44,34.06 64.26,32.88 IC3.5 | IC7.5 77.22,33.78 77.22,44.2 IC8.5 77.22,46.74 77.22,57.15 IC9.5 77.22,59.69 77.22,69.85 IC10.5 | IC14.5 87.63,71.26 88.8,70.08 88.8,59.71 87.63,58.54 IC13.5 87.63,58.05 88.8,56.87 88.8,46.76 87.63,45.58 IC12.5 87.63,45.35 88.8,44.17 88.8,33.55 87.77,32.51 IC11.5 | v22.35,41.91 22.35,38.51 24.49,36.37 48.37,36.37 50.14,38.15 50.14,38.2 U$1.P34 39.46,52.24 v39.46,55.37 | IC21.5 37.08,12.63 38.3,13.85 48.09,13.85 49.31,12.62 IC22.5 51.1,12.62 52.27,13.8 60.1,13.8 61.27,12.62 IC23.5 62.09,12.62 63.27,13.8 72.62,13.8 73.8,12.62 IC24.5 | IC17.5 37.18,23.29 38.53,21.94 48.14,21.94 49.49,23.29 IC18.5 49.73,23.29 51.08,21.94 60.38,21.94 IC19.5 61.87,23.29 63.22,21.94 72.6,21.94 73.91,23.26 IC20.5 | v5.41,32.59 5.41,32.5 2.6,29.69 2.6,23.17 3.39,22.39 4.25,22.39 J7.2 17.78,8.87 v18.24,8.87
N$1
  GND1 0.381: R5.2 7.71,80.01 16.76,80.01 U$1.P61
N$3
  GND1 0.381: LED2.A 3.68,88.33 R5.1
N$4
  GND1 0.381: LED1.A 25.58,12.84 16.32,22.1 R1.2
N$5
  GND1 0.381: R8.2 39.98,47.92 Z2.1 R6.1 29.97,48.93 29.97,56.13 18.75,67.36 18.75,74.55 21.34,77.14 U$1.P60
N$6  (1 unrouted)
N$19
  GND1 0.381: Z1.1 23.64,70.73 23.59,70.78 | 23.59,70.78 R3.2 | U$1.P59 26.21,75.64 26.21,70.93 R2.1 23.59,70.78
POTVOLT1
  GND1 0.381: IC1.9 42.66,68.51 IC2.1
POTVOLT2
  GND1 0.381: IC16.9 34.61,39.08 39.24,43.7 IC15.1
TESTVOLT1
  GND1 0.381: IC1.10 42.01,61.7 42.68,61.03 42.68,58.53 IC1.8
TESTVOLT2
  GND1 0.381: IC16.10 31.29,39.73 30.62,39.06 27.69,39.06 IC16.8

## Text on the board
tPlace: H2 | > | H1
tNames: 3v3 | > | VoltReg2 | GND | +5v | MemA9 | MemA5 | MemA1 | VoltReg1 | DigiPot1 | MemA10 | MemA6 | MemA2 | VoltReg3 | DigiPot2 | MemA11 | MemA7 | MemA3 | MSP430-H2618 | MemA12 | MemA8 | MemA4 | CLK | VAMem | MISO | MOSI | GND | VBMem | MemB5 | MemB6 | MemB7 | MemB8 | Memory / Experiment / V1.1 | MemB1 | MemB2 | MemB3 | MemB4